# Altium PCB LPCB225R0.PcbDoc
Units mm, origin at the board's own origin, x right, y up, seen from the top; angles counter-clockwise.
Board outline 79 x 93 mm, 4 copper layers (Top Layer, Internal Plane 1, Mid-Layer 1, Bottom Layer); 110 components, 77 nets, 306 pads, 172 vias.
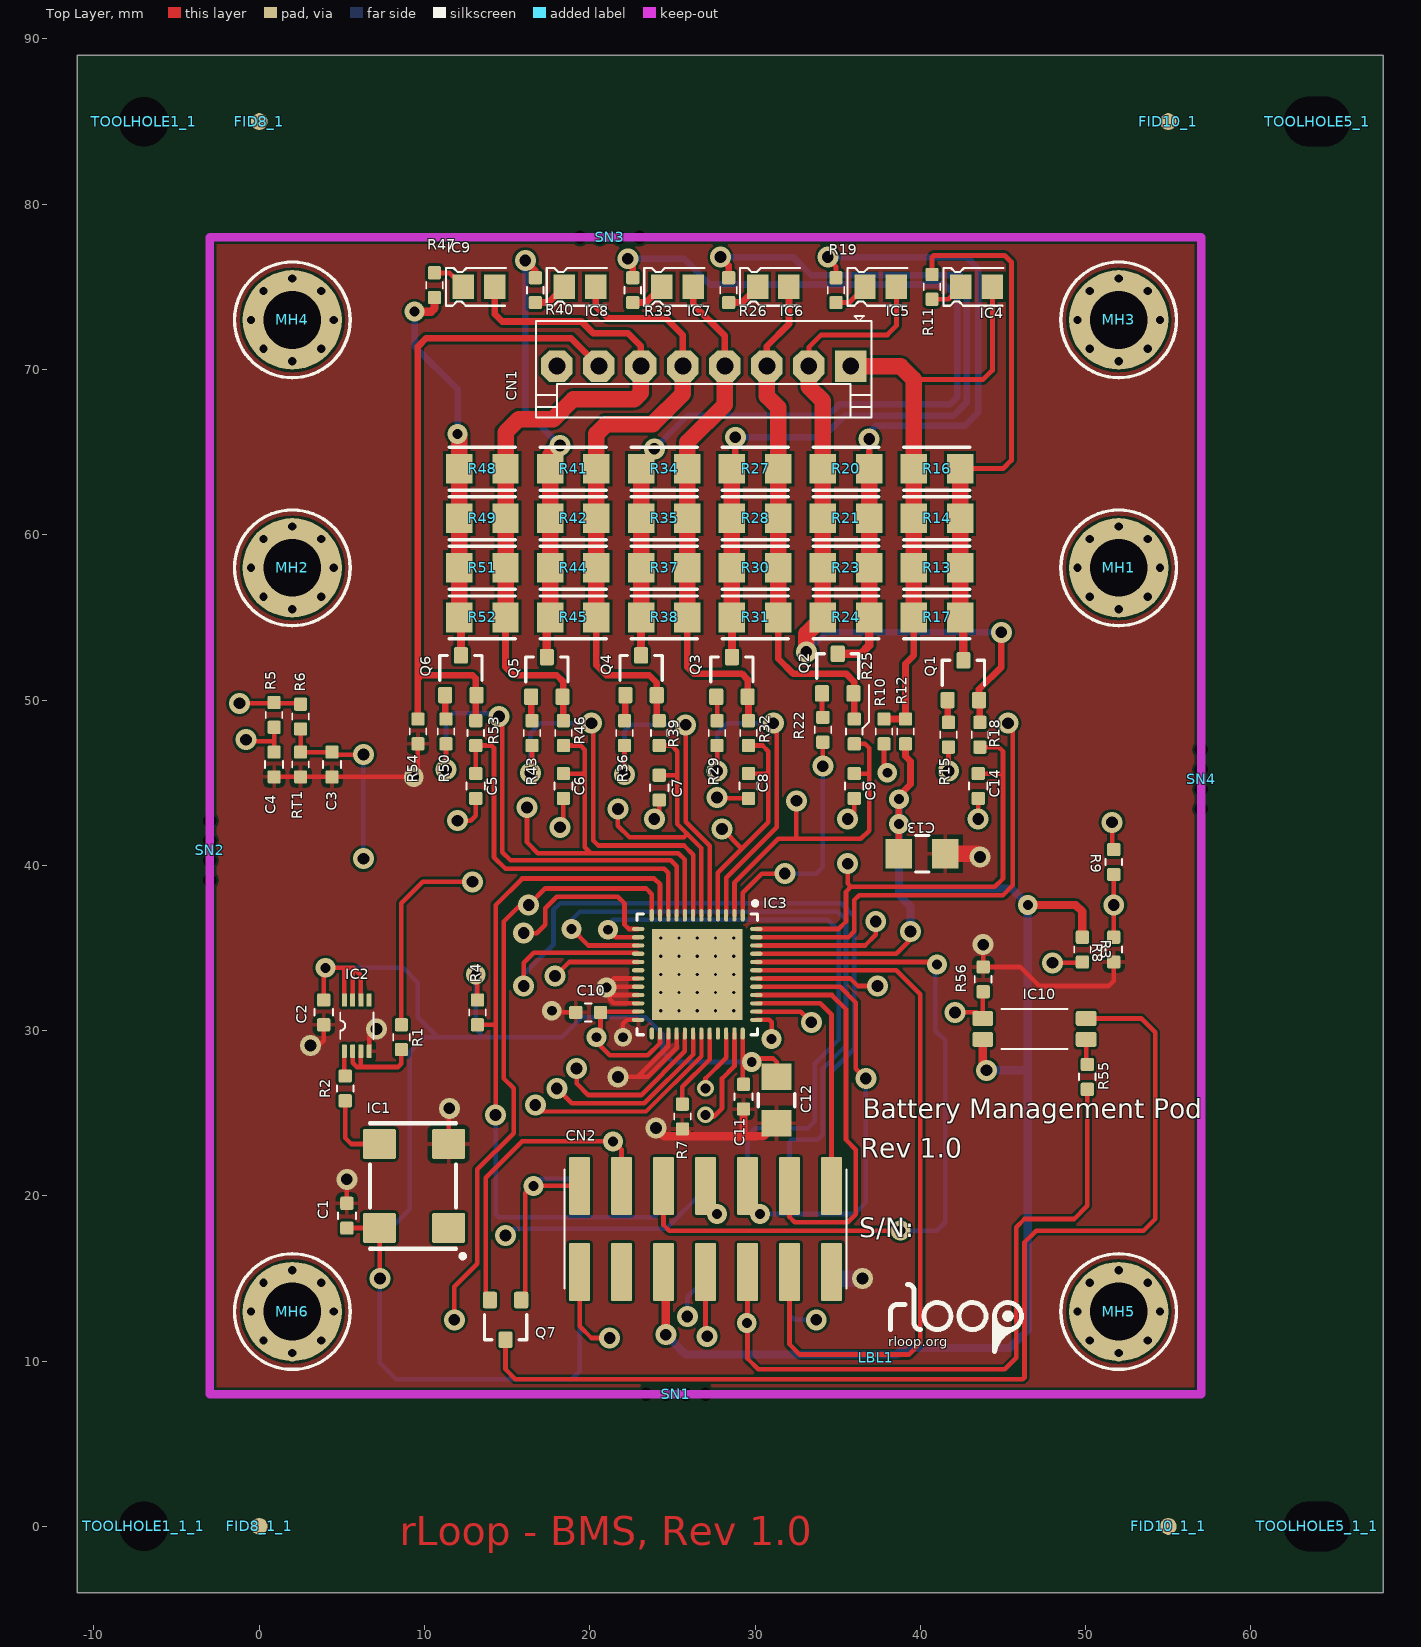
[diagram p0: Top Layer view]
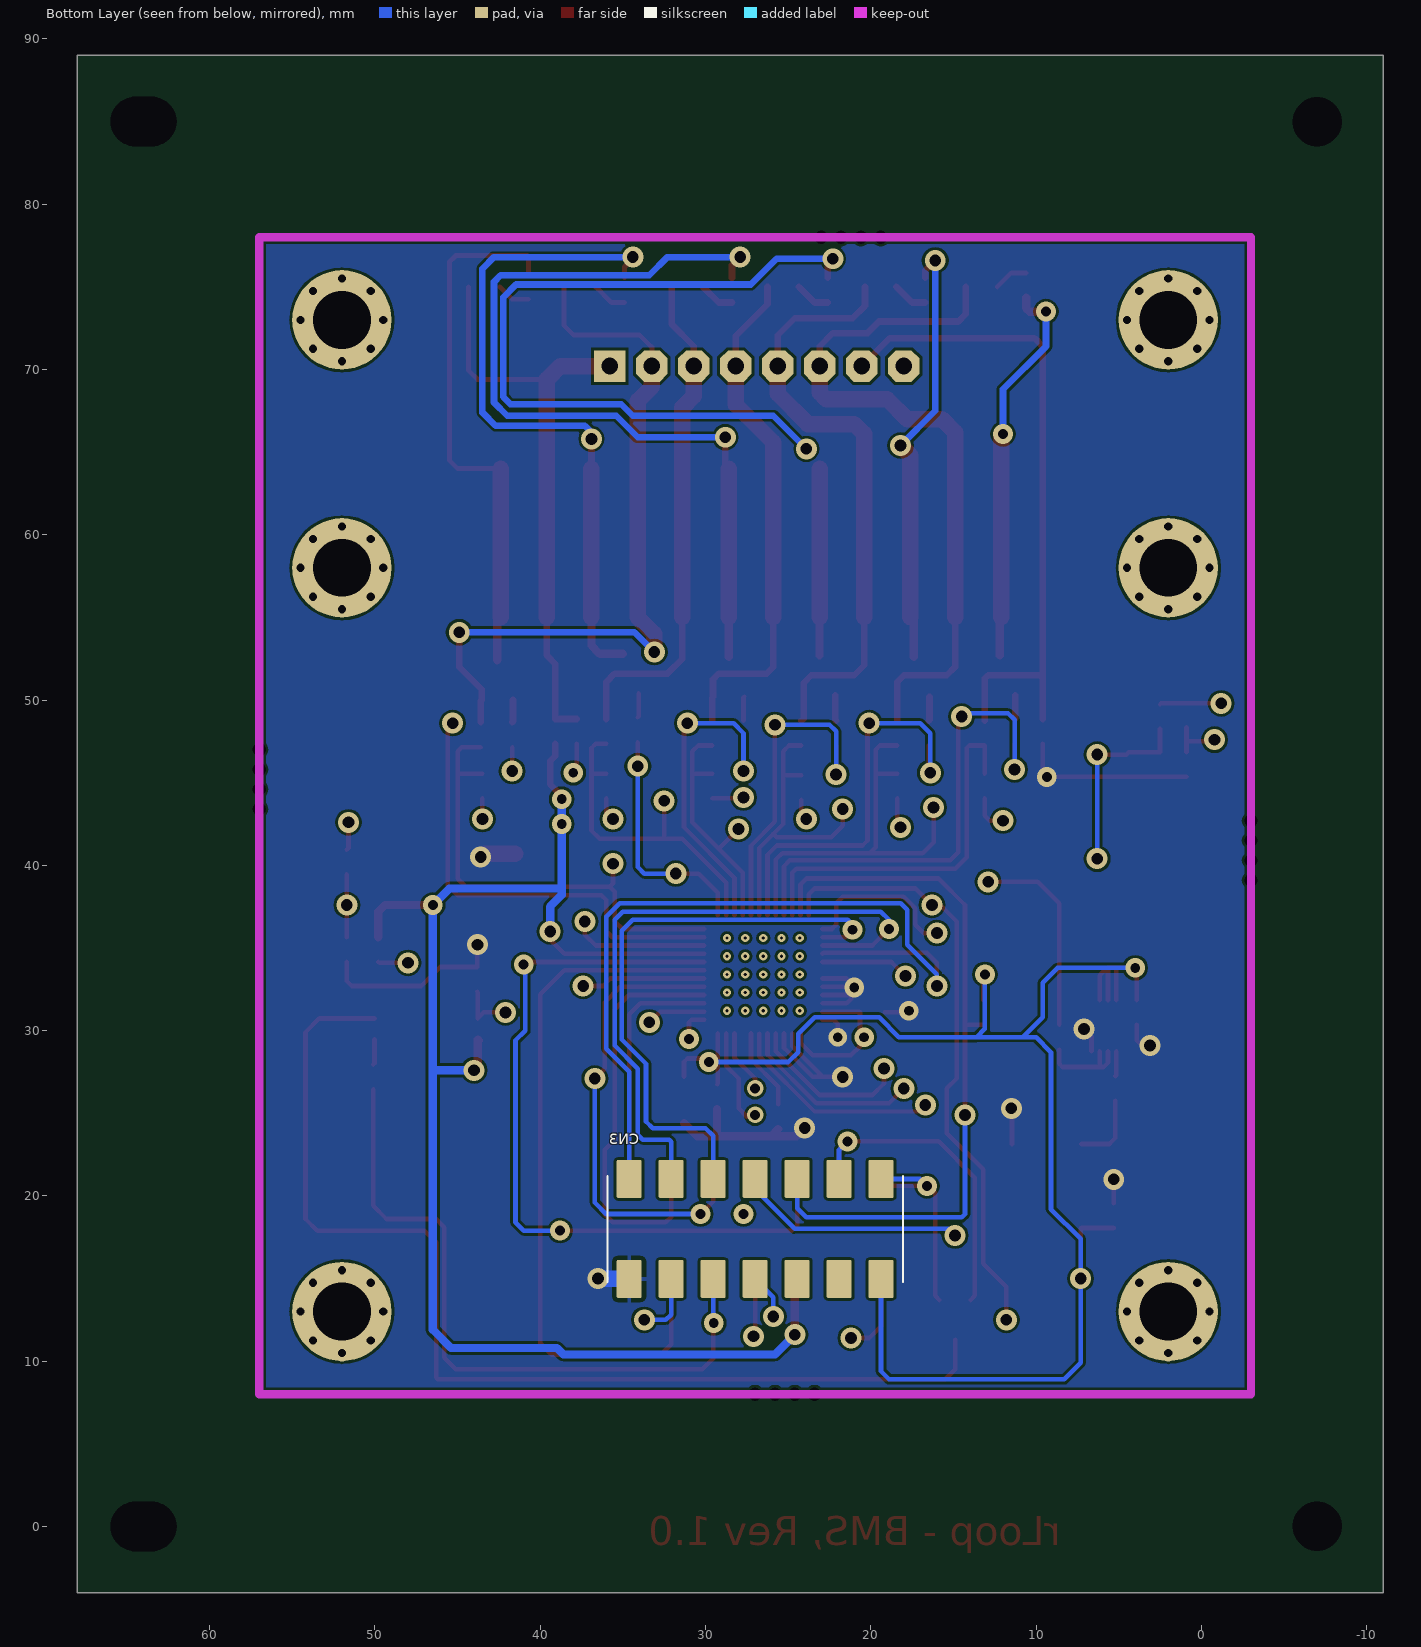
[diagram p1: Bottom Layer view, seen from below]
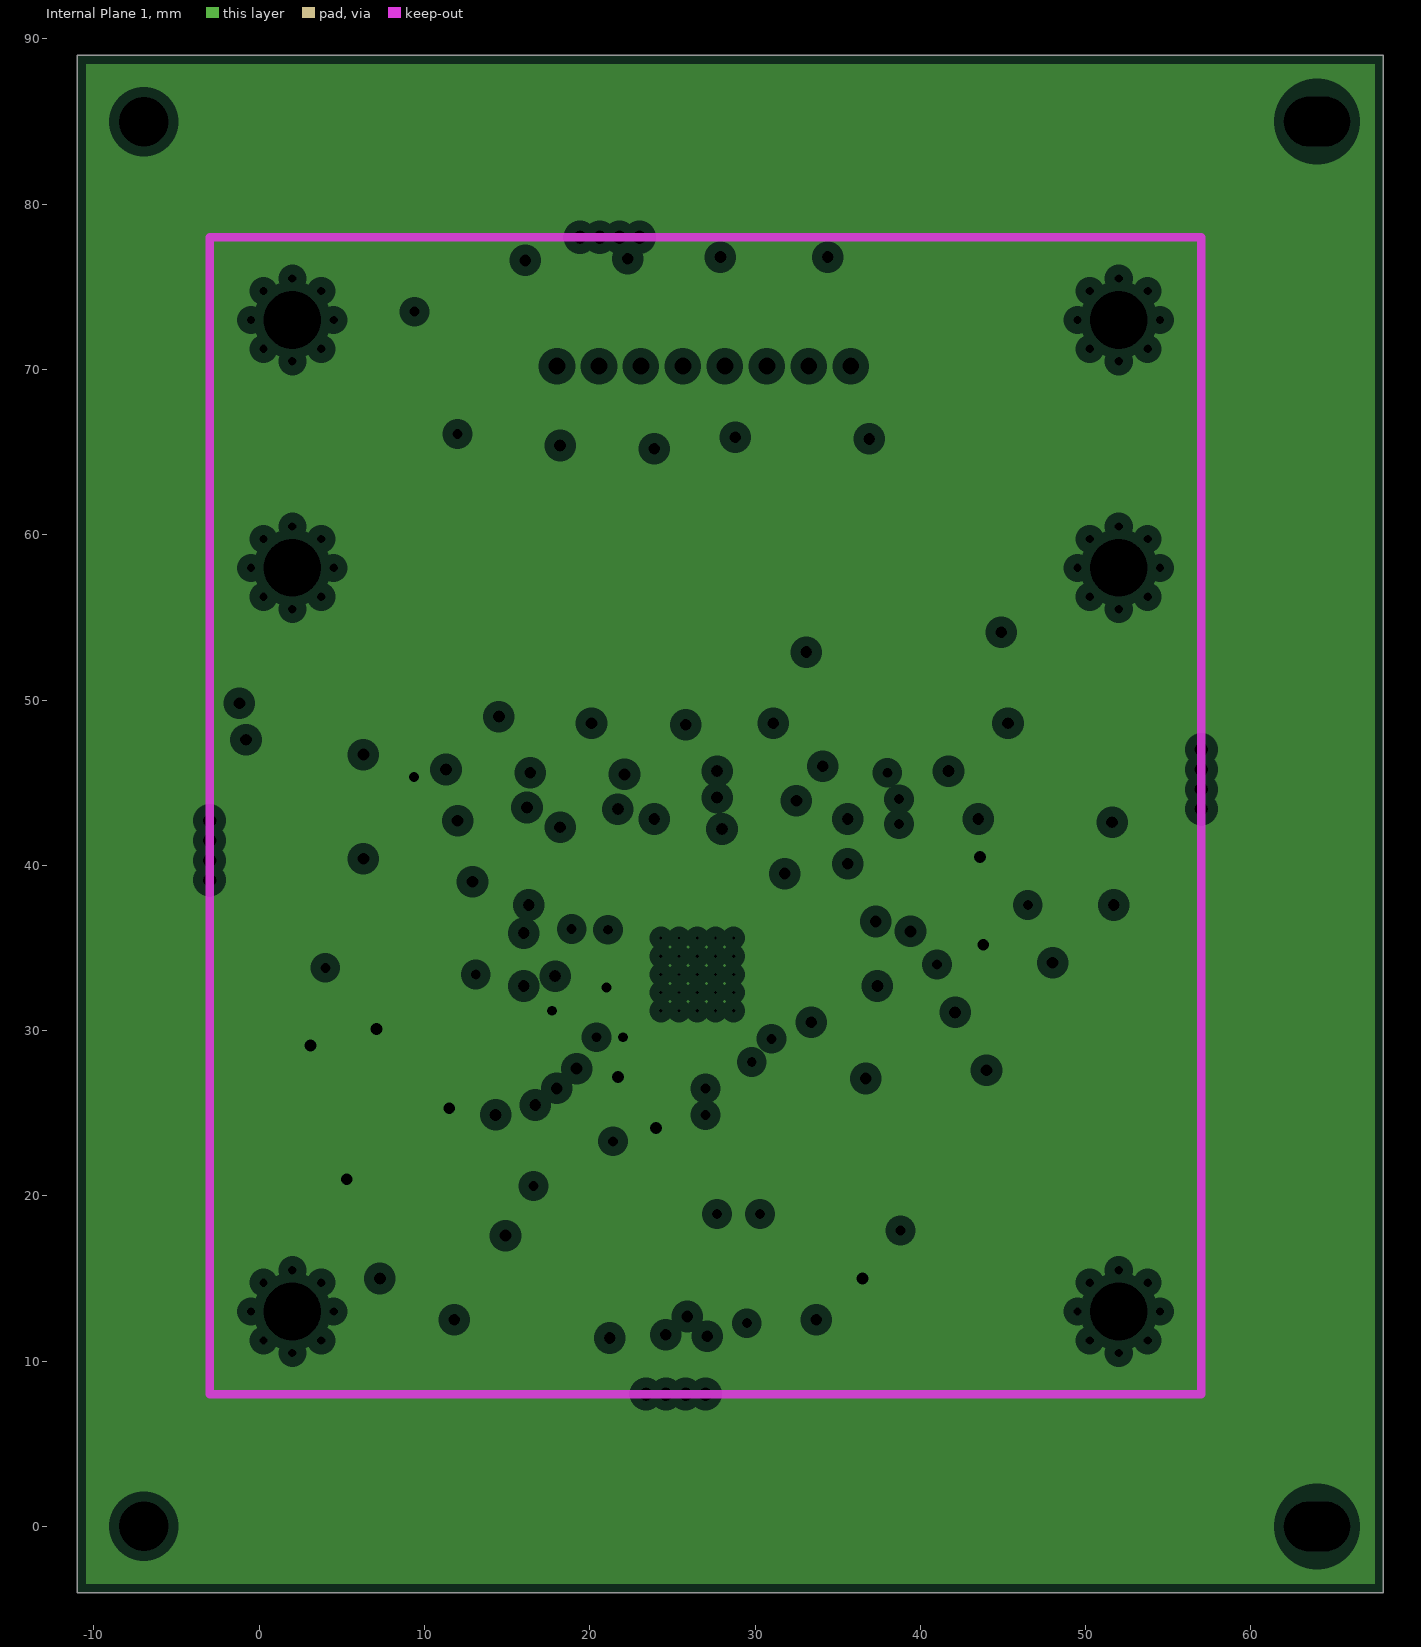
[diagram p2: Internal Plane 1, clearances drawn from the general rule]
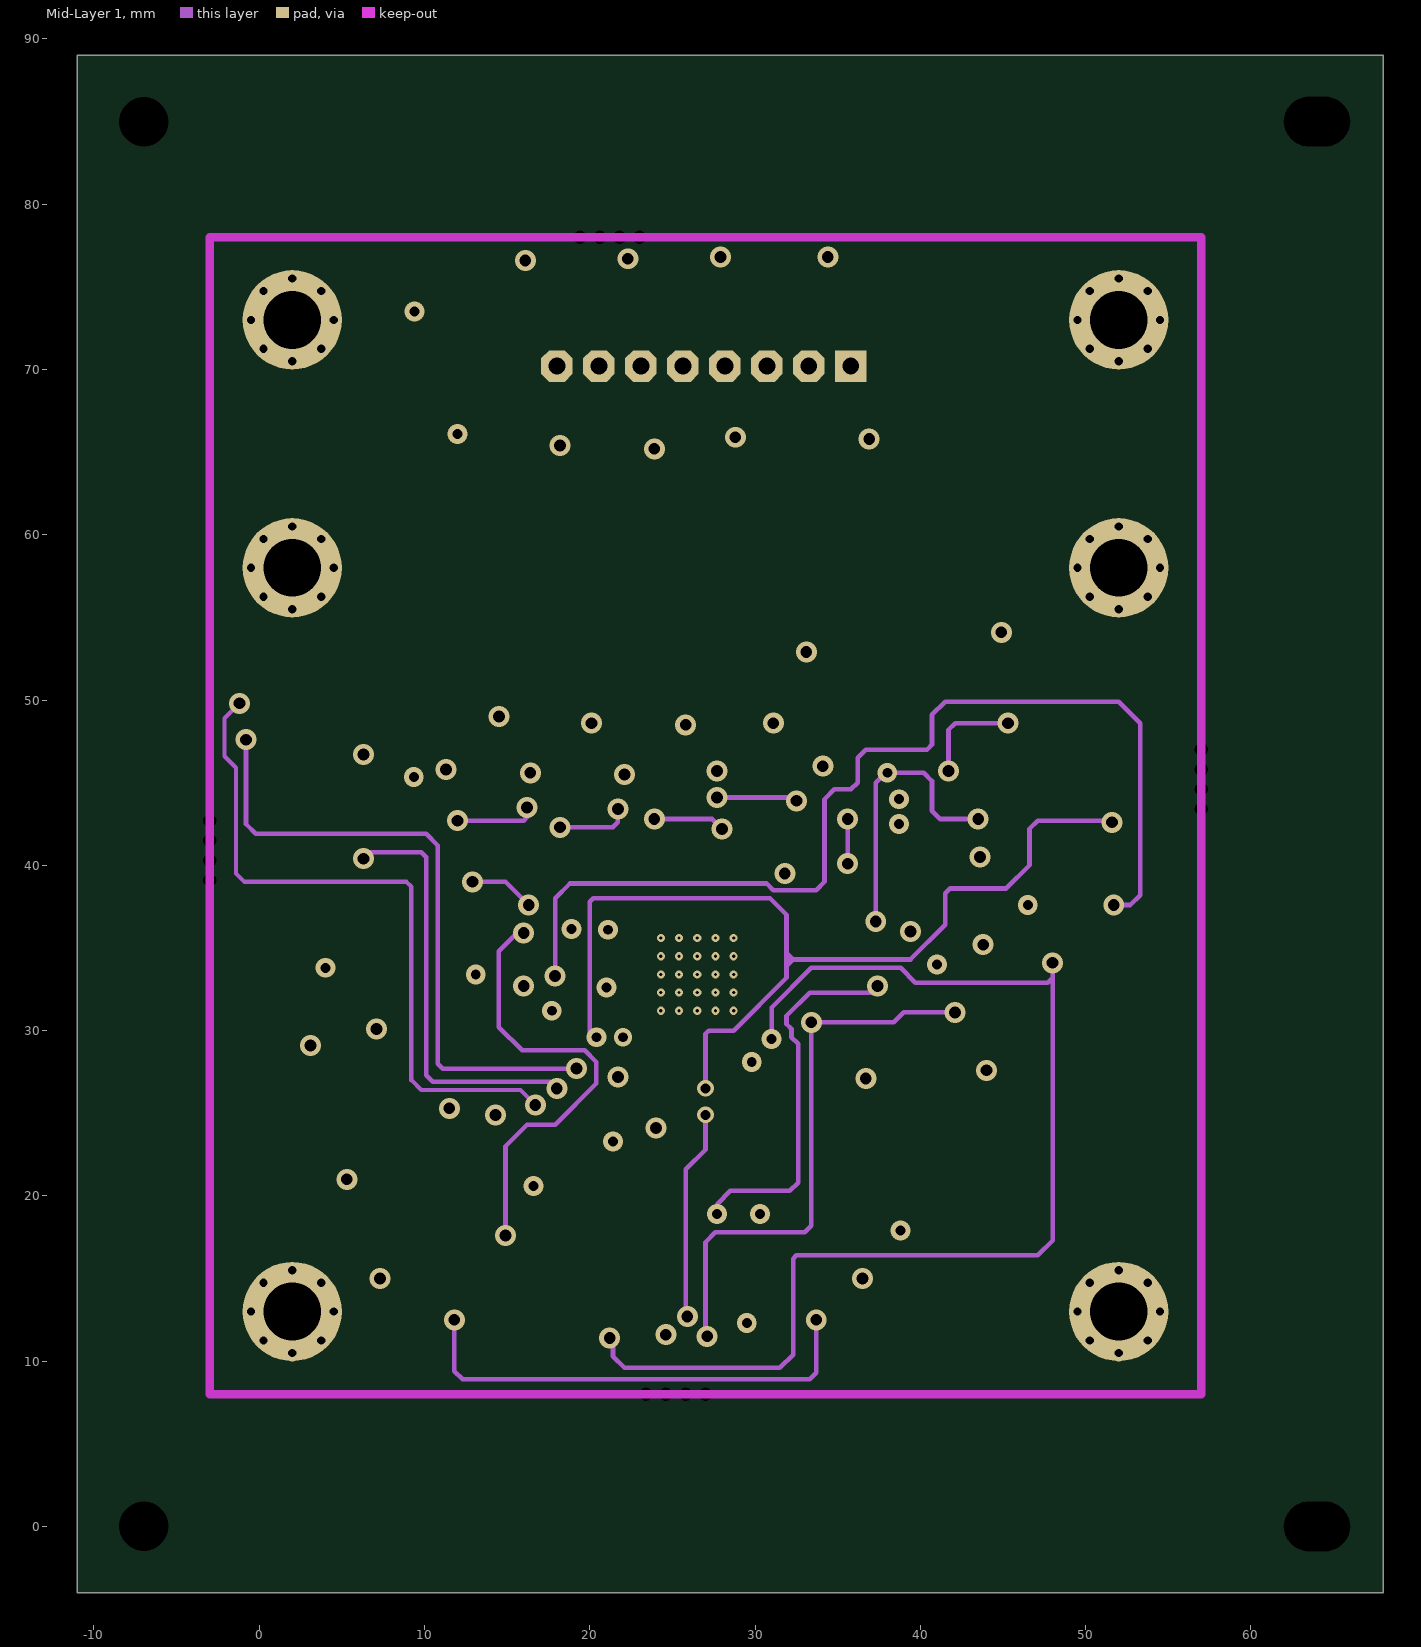
[diagram p3: Mid-Layer 1]

## Layer stack, top to bottom
Top Layer: signal copper 0.0356
Dielectric: core 0.32, FR-4, Dk 4.8
Internal Plane 1: plane copper 0.0356, net ATAGND
Dielectric: prepreg 0.32, FR-4, Dk 4.8
Mid-Layer 1: signal copper 0.0356
Dielectric: core 0.32, FR-4, Dk 4.8
Bottom Layer: signal copper 0.0356

## Board outline
-11,-4 -11,89 68,89 68,-4

## Design rules (kind name [scope] priority, off if disabled: settings)
Clearance [All] p1: gap=0.16
HoleSize [All] p1: absolutevalues=TRUE maxlimit=5 minlimit=0.025 maxpercent=80.000 minpercent=20.000
MinimumSolderMaskSliver [All] p1 off: minsoldermaskwidth=0.1
PlaneClearance [All] p1: clearance=0.6
PlaneConnect [All] p1: planeconnectstyle=Relief reliefexpansion=0.508 reliefentries=4 reliefconductorwidth=0.254 reliefairgap=0.254
PolygonConnect [IsVia] p1: connectstyle=Direct reliefconductorwidth=0.254 reliefentries=4 polygonreliefangle="90 Angle" airgapwidth=0.254
PolygonConnect PolygonConnect_1 [All] p2: connectstyle=Relief reliefconductorwidth=0.254 reliefentries=4 polygonreliefangle="90 Angle" airgapwidth=0.254
RoomDefinition "U_LPCB225 - POWER DOWN CONTROLLER" [InComponentClass('U_LPCB225 - POWER DOWN CONTROLLER')] p1: confinementstyle=ConfineIn formatcopy=TRUE lockcomponents=FALSE outline -79.611,-108.179 -28.811,-108.179 -28.811,-82.779 -79.611,-82.779
RoomDefinition "U_LPCB225 - CONTROLLER" [InComponentClass('U_LPCB225 - CONTROLLER')] p2: confinementstyle=ConfineIn formatcopy=TRUE lockcomponents=FALSE outline -79.611,-108.179 -28.811,-108.179 -28.811,-82.779 -79.611,-82.779
RoomDefinition "U_LPCB225 - DISCHARGE" [InComponentClass('U_LPCB225 - DISCHARGE')] p3: confinementstyle=ConfineIn formatcopy=TRUE lockcomponents=FALSE outline -79.611,-108.179 -28.811,-108.179 -28.811,-82.779 -79.611,-82.779
RoomDefinition "U_LPCB225 - CLOCK" [InComponentClass('U_LPCB225 - CLOCK')] p4: confinementstyle=ConfineIn formatcopy=TRUE lockcomponents=FALSE outline -79.611,-108.179 -28.811,-108.179 -28.811,-82.779 -79.611,-82.779
RoomDefinition "LPCB225 - OVERVIEW" [InComponentClass('LPCB225 - OVERVIEW')] p5: confinementstyle=ConfineIn formatcopy=TRUE lockcomponents=FALSE outline -79.611,-108.179 -28.811,-108.179 -28.811,-82.779 -79.611,-82.779
RoomDefinition "U_LPCB225 - STACK CONNECTORS" [InComponentClass('U_LPCB225 - STACK CONNECTORS')] p6: confinementstyle=ConfineIn formatcopy=TRUE lockcomponents=FALSE outline 69.089,69.421 88.189,69.421 88.189,90.321 69.089,90.321
RoutingVias [All] p1: holewidth=0.6 width=1.2 viastyle="Through Hole" minholewidth=0.6 minwidth=1.2 maxholewidth=1 maxwidth=3
SilkToSilkClearance [All] p1 off: silktosilkclearance=0.254
SilkToSolderMaskClearance [IsPad] p1 off: minsilkscreentomaskgap=0.254 clearancetoexposedcopper=TRUE
SolderMaskExpansion [All] p1: expansion=0.102
Width [All] p1: maxlimit=2 minlimit=0.254 preferedwidth=0.254
22 further rules are at their usual default settings.

## Classes and differential pairs
component class "LPCB225 - OVERVIEW": CN1 LBL1 MH1 MH2 MH3 MH4 MH5 MH6 SN1 SN2 SN3 SN4
component class "U_LPCB225 - CLOCK": C1 C2 IC1 IC2 R1 R2
component class "U_LPCB225 - CONTROLLER": C3 C4 C5 C6 C7 C8 C9 C10 C11 C12 C14 IC3 R3 R4 R5 R6 R7 R8 R9 RT1
component class "U_LPCB225 - DISCHARGE": C13 IC4 IC5 IC6 IC7 IC8 IC9 Q1 Q2 Q3 Q4 Q5 Q6 R10 R11 R12 R13 R14 R15 R16 R17 R18 R19 R20 R21 R22 R23 R24 R25 R26 R27 R28 R29 R30 R31 R32 R33 R34 R35 R36 R37 R38 R39 R40 R41 R42 R43 R44 R45 R46 R47 R48 R49 R50 R51 R52 R53 R54
component class "U_LPCB225 - POWER DOWN CONTROLLER": IC10 Q7 R55 R56
component class "U_LPCB225 - STACK CONNECTORS": CN2 CN3

## Components (designator, comment, footprint, x,y, rotation, side; value= is the part's Value field where it differs from the comment)
C1 "100n / 50V / 10% / SMD 0603" LFP011__CC1608-0603-IPC7351_B 5.3,18.8 r90 top
C2 "100n / 50V / 10% / SMD 0603" LFP011__CC1608-0603-IPC7351_B 3.9,31.1 r270 top
C3 "100n / 50V / 10% / SMD 0603" LFP011__CC1608-0603-IPC7351_B 4.4,46.1 r270 top
C4 "100n / 50V / 10% / SMD 0603" LFP011__CC1608-0603-IPC7351_B 0.9,46.1 r270 top
C5 "100n / 50V / 10% / SMD 0603" LFP011__CC1608-0603-IPC7351_B 13.1,44.8 r90 top
C6 "100n / 50V / 10% / SMD 0603" LFP011__CC1608-0603-IPC7351_B 18.4,44.8 r90 top
C7 "100n / 50V / 10% / SMD 0603" LFP011__CC1608-0603-IPC7351_B 24.2,44.7 r90 top
C8 "100n / 50V / 10% / SMD 0603" LFP011__CC1608-0603-IPC7351_B 29.6,44.8 r90 top
C9 "100n / 50V / 10% / SMD 0603" LFP011__CC1608-0603-IPC7351_B 36,44.8 r90 top
C10 "100n / 50V / 10% / SMD 0603" LFP011__CC1608-0603-IPC7351_B 19.9,31.1 r180 top
C11 "100n / 50V / 10% / SMD 0603" LFP011__CC1608-0603-IPC7351_B 29.3,26 r270 top
C12 "47uF / 25V / 20% / SMD 1206" LFP043__CC3216-1206 31.3,25.8 r270 top
C13 "10uF / 35V / X7R / SMD 1206" LFP043__CC3216-1206 40.1,40.7 r0 top
C14 "100n / 50V / 10% / SMD 0603" LFP011__CC1608-0603-IPC7351_B 43.5,44.8 r90 top
CN1 "640456-8" 640456-8 26.9,70.2 r180 top
CN2 "1241050-7" 1241050-7 27,18 r180 top locked
CN3 "5-147741-7" 5-147741-7 27,18 r180 bottom locked
FID8_1 "FIDUCIAL" FIDTOP 0,85 r0 top
FID8_1_1 "FIDUCIAL" FIDTOP 0,0 r0 top
FID10_1 "FIDUCIAL" FIDTOP 55,85 r0 top
FID10_1_1 "FIDUCIAL" FIDTOP 55,0 r0 top
IC1 "FXO-HC736R-1.000" LFP132__SMO-190 9.3,20.6 r90 top
IC2 "SN74AUP1G74DCUR" LFP052__DCU-S-PDSO-G8 5.9,30.3 r0 top
IC3 "ATA6870N-PLQW-1" LFP136__QFN50P700X700X80_HS-49M 26.5,33.4 r180 top locked
IC4 "EL-17-21VGC/TR8" CR2012-0805-LED 43.4,75 r0 top
IC5 "EL-17-21VGC/TR8" CR2012-0805-LED 37.6,75 r0 top
IC6 "EL-17-21VGC/TR8" CR2012-0805-LED 31.1,75 r0 top
IC7 "EL-17-21VGC/TR8" CR2012-0805-LED 25.3,75 r0 top
IC8 "EL-17-21VGC/TR8" CR2012-0805-LED 19.4,75 r0 top
IC9 "EL-17-21VGC/TR8" CR2012-0805-LED 13.3,75 r0 top
IC10 "VOS618A-2X001T" LFP085__VOS618A 46.9,30.1 r180 top
LBL1 "RLOOP_LOGO" RLOOP_LOGO 37.3,10.2 r0 top
MH1 "MOUNTING_HOLE_3MM" MOUNTING_HOLE_3MM 52,58 r0 top locked
MH2 "MOUNTING_HOLE_3MM" MOUNTING_HOLE_3MM 2,58 r0 top locked
MH3 "MOUNTING_HOLE_3MM" MOUNTING_HOLE_3MM 52,73 r0 top locked
MH4 "MOUNTING_HOLE_3MM" MOUNTING_HOLE_3MM 2,73 r0 top locked
MH5 "MOUNTING_HOLE_3MM" MOUNTING_HOLE_3MM 52,13 r0 top locked
MH6 "MOUNTING_HOLE_3MM" MOUNTING_HOLE_3MM 2,13 r0 top locked
Q1 "BSS138" LFP021__SOT23 42.6,51.2 r0 top
Q2 "BSS138" LFP021__SOT23 35,51.6 r0 top
Q3 "BSS138" LFP021__SOT23 28.6,51.4 r0 top
Q4 "BSS138" LFP021__SOT23 23.1,51.5 r0 top
Q5 "BSS138" LFP021__SOT23 17.4,51.4 r0 top
Q6 "BSS138" LFP021__SOT23 12.2,51.5 r0 top
Q7 "FDN337N" LFP021__SOT23 14.9,12.5 r180 top
R1 "47R / 0.1W / 1% / SMD 0603" LFP020__CR1608-0603-IPC7351_B 8.6,29.6 r90 top
R2 "47R / 0.1W / 1% / SMD 0603" LFP020__CR1608-0603-IPC7351_B 5.2,26.5 r90 top
R3 "0R / 0.1W / SMD 0603" LFP020__CR1608-0603-IPC7351_B 49.8,34.9 r270 top
R4 "10K / 0.1W / 1% / SMD 0603" LFP020__CR1608-0603-IPC7351_B 13.2,31.1 r90 top
R5 "10K / 0.1W / 1% / SMD 0603" LFP020__CR1608-0603-IPC7351_B 0.9,49.1 r90 top
R6 "10K / 0.1W / 1% / SMD 0603" LFP020__CR1608-0603-IPC7351_B 2.5,49 r90 top
R7 "121K / 0.1W / 1% / SMD 0603" LFP020__CR1608-0603-IPC7351_B 25.6,24.8 r270 top
R8 "10K / 0.1W / 1% / SMD 0603" LFP020__CR1608-0603-IPC7351_B 51.7,34.9 r90 top
R9 "10K / 0.1W / 1% / SMD 0603" LFP020__CR1608-0603-IPC7351_B 51.7,40.2 r270 top
R10 "1K0 / 0.063W / 1% / SMD 0603" LFP020__CR1608-0603-IPC7351_B 37.8,48.1 r270 top
R11 "100K / 0.063W / 1% / SMD 0603" LFP020__CR1608-0603-IPC7351_B 40.7,75 r90 top
R12 "10R / 0.125W / 1% / SMD 0603" LFP020__CR1608-0603-IPC7351_B 39.1,48.1 r90 top
R13 "82.5R / 0.25W / 1% / SMD 1206" LFP107__CR3216-1206 41,58 r0 top
R14 "82.5R / 0.25W / 1% / SMD 1206" LFP107__CR3216-1206 41,61 r0 top
R15 "1K0 / 0.063W / 1% / SMD 0603" LFP020__CR1608-0603-IPC7351_B 41.7,47.9 r270 top
R16 "82.5R / 0.25W / 1% / SMD 1206" LFP107__CR3216-1206 41,64 r0 top
R17 "82.5R / 0.25W / 1% / SMD 1206" LFP107__CR3216-1206 41,55 r0 top
R18 "1K0 / 0.063W / 1% / SMD 0603" LFP020__CR1608-0603-IPC7351_B 43.6,47.9 r270 top
R19 "100K / 0.063W / 1% / SMD 0603" LFP020__CR1608-0603-IPC7351_B 34.9,74.8 r90 top
R20 "82.5R / 0.25W / 1% / SMD 1206" LFP107__CR3216-1206 35.5,64 r0 top
R21 "82.5R / 0.25W / 1% / SMD 1206" LFP107__CR3216-1206 35.5,61 r0 top
R22 "1K0 / 0.063W / 1% / SMD 0603" LFP020__CR1608-0603-IPC7351_B 34.1,48.2 r270 top
R23 "82.5R / 0.25W / 1% / SMD 1206" LFP107__CR3216-1206 35.5,58 r0 top
R24 "82.5R / 0.25W / 1% / SMD 1206" LFP107__CR3216-1206 35.5,55 r0 top
R25 "1K0 / 0.063W / 1% / SMD 0603" LFP020__CR1608-0603-IPC7351_B 36,48.1 r270 top
R26 "100K / 0.063W / 1% / SMD 0603" LFP020__CR1608-0603-IPC7351_B 28.4,74.8 r90 top
R27 "82.5R / 0.25W / 1% / SMD 1206" LFP107__CR3216-1206 30,64 r180 top
R28 "82.5R / 0.25W / 1% / SMD 1206" LFP107__CR3216-1206 30,61 r180 top
R29 "1K0 / 0.063W / 1% / SMD 0603" LFP020__CR1608-0603-IPC7351_B 27.7,48 r270 top
R30 "82.5R / 0.25W / 1% / SMD 1206" LFP107__CR3216-1206 30,58 r180 top
R31 "82.5R / 0.25W / 1% / SMD 1206" LFP107__CR3216-1206 30,55 r180 top
R32 "1K0 / 0.063W / 1% / SMD 0603" LFP020__CR1608-0603-IPC7351_B 29.6,48 r270 top
R33 "100K / 0.063W / 1% / SMD 0603" LFP020__CR1608-0603-IPC7351_B 22.6,74.8 r90 top
R34 "82.5R / 0.25W / 1% / SMD 1206" LFP107__CR3216-1206 24.5,64 r180 top
R35 "82.5R / 0.25W / 1% / SMD 1206" LFP107__CR3216-1206 24.5,61 r180 top
R36 "1K0 / 0.063W / 1% / SMD 0603" LFP020__CR1608-0603-IPC7351_B 22.1,48 r270 top
R37 "82.5R / 0.25W / 1% / SMD 1206" LFP107__CR3216-1206 24.5,58 r180 top
R38 "82.5R / 0.25W / 1% / SMD 1206" LFP107__CR3216-1206 24.5,55 r180 top
R39 "1K0 / 0.063W / 1% / SMD 0603" LFP020__CR1608-0603-IPC7351_B 24.2,48 r270 top
R40 "100K / 0.063W / 1% / SMD 0603" LFP020__CR1608-0603-IPC7351_B 16.7,74.8 r90 top
R41 "82.5R / 0.25W / 1% / SMD 1206" LFP107__CR3216-1206 19,64 r180 top
R42 "82.5R / 0.25W / 1% / SMD 1206" LFP107__CR3216-1206 19,61 r180 top
R43 "1K0 / 0.063W / 1% / SMD 0603" LFP020__CR1608-0603-IPC7351_B 16.5,48 r270 top
R44 "82.5R / 0.25W / 1% / SMD 1206" LFP107__CR3216-1206 19,58 r180 top
R45 "82.5R / 0.25W / 1% / SMD 1206" LFP107__CR3216-1206 19,55 r180 top
R46 "1K0 / 0.063W / 1% / SMD 0603" LFP020__CR1608-0603-IPC7351_B 18.4,48 r270 top
R47 "100K / 0.063W / 1% / SMD 0603" LFP020__CR1608-0603-IPC7351_B 10.6,75.1 r270 top
R48 "82.5R / 0.25W / 1% / SMD 1206" LFP107__CR3216-1206 13.5,64 r180 top
R49 "82.5R / 0.25W / 1% / SMD 1206" LFP107__CR3216-1206 13.5,61 r180 top
R50 "1K0 / 0.063W / 1% / SMD 0603" LFP020__CR1608-0603-IPC7351_B 11.3,48.1 r270 top
R51 "82.5R / 0.25W / 1% / SMD 1206" LFP107__CR3216-1206 13.5,58 r180 top
R52 "82.5R / 0.25W / 1% / SMD 1206" LFP107__CR3216-1206 13.5,55 r180 top
R53 "1K0 / 0.063W / 1% / SMD 0603" LFP020__CR1608-0603-IPC7351_B 13.1,48 r270 top
R54 "10R / 0.125W / 1% / SMD 0603" LFP020__CR1608-0603-IPC7351_B 9.6,48.1 r90 top
R55 "270R / 0.1W / 5% / SMD 0603" LFP020__CR1608-0603-IPC7351_B 50.1,27.2 r270 top
R56 "2.2K / 0.1W / 1% / SMD 0603" LFP020__CR1608-0603-IPC7351_B 43.8,33.1 r270 top
RT1 "NTCS0603E3103JLT" LFP020__CR1608-0603-IPC7351_B 2.5,46.1 r90 top
SN1 "PCB_SNAPOUT" SNAPOUT_NEW 27,8 r180 top
SN2 "PCB_SNAPOUT" SNAPOUT_NEW -3,39.1 r90 top
SN3 "PCB_SNAPOUT" SNAPOUT_NEW 23,78 r180 top
SN4 "PCB_SNAPOUT" SNAPOUT_NEW 57,43.4 r90 top
TOOLHOLE1_1 "Comment" TOOL-1#1 -7,85 r0 top
TOOLHOLE1_1_1 "Comment" TOOL-1#1 -7,0 r0 top
TOOLHOLE5_1 "Comment" TOOL-1#2 64,85 r0 top
TOOLHOLE5_1_1 "Comment" TOOL-1#2 64,0 r0 top

## Footprints (in the part's own frame and the unit in brackets; to place one, negate y for a bottom-side part, rotate by r counter-clockwise, add the part's x,y. Pads: shape width x height; smd on the part's side, far side on the other; paste and mask are expansions set on the pad)
5-147741-7 [mm]
  rrect10% 1.52x2.29 smd: 1(-7.62,3.025) 2(-7.62,-3.025) 3(-5.08,3.025) 4(-5.08,-3.025) 5(-2.54,3.025) 6(-2.54,-3.025) 7(0,3.025) 8(0,-3.025) 9(2.54,3.025) 10(2.54,-3.025) 11(5.08,3.025) 12(5.08,-3.025) 13(7.62,3.025) 14(7.62,-3.025)
  silkscreen extent -8.94,-3.2 8.94,3.2
640456-8 [mm] "Connector, Male Header, 8 Way"
  rect 1.905x1.905 hole 1.02: 1(-8.89,0)
  oct 1.905x1.905 hole 1.02: 2(-6.35,0) 3(-3.81,0) 4(-1.27,0) 5(1.27,0) 6(3.81,0) 7(6.35,0) 8(8.89,0)
  silkscreen extent -10.15,-3.04 10.17,3.1
1241050-7 [mm]
  rrect10% 1.27x3.5 smd paste-0.01: 1(-7.62,-2.605) 2(-7.62,2.605) 3(-5.08,-2.605) 4(-5.08,2.605) 5(-2.54,-2.605) 6(-2.54,2.605) 7(0,-2.605) 8(0,2.605) 9(2.54,-2.605) 10(2.54,2.605) 11(5.08,-2.605) 12(5.08,2.605) 13(7.62,-2.605) 14(7.62,2.605)
  silkscreen extent -8.54,-3.6 8.54,3.6
CR2012-0805-LED [mm]
  rect 1.3x1.5 smd: A(0.95,0) K(-0.95,0)
  silkscreen extent -2.01,-1.14 1.63,1.14
FIDTOP [mil]
  round 40 smd mask+39.37: 1(0,0)
LFP011__CC1608-0603-IPC7351_B [mm]
  rrect25% 0.8x0.8 smd: 1(-0.75,0) 2(0.75,0)
  silkscreen extent -0.2,-0.55 0.2,0.55
LFP020__CR1608-0603-IPC7351_B [mm]
  rrect25% 0.8x0.8 smd: 1(-0.75,0) 2(0.75,0)
  silkscreen extent -0.2,-0.5 0.2,0.5
LFP021__SOT23 [mm] "SOT-23; 3 Leads; Body 3.0 x 2.5 mm, inc. leads (LxW max)"
  rrect25% 0.85x1 smd paste-0.05: 1(-0.95,-1.2) 2(0.95,-1.2) 3(0,1.2)
  silkscreen extent -1.27,-0.3 1.28,1.2
LFP043__CC3216-1206 [mm]
  rect 1.6x1.8 smd paste-0.01: 1(-1.4,0) 2(1.4,0)
  silkscreen extent -0.4,-1.1 0.4,1.1
LFP052__DCU-S-PDSO-G8 [mm] "TI DCU (S-PDSO-G8) PLASTIC SMALL-OUTLINE PACKAGE (DIE DOWN)"
  rrect25% 0.3x0.8 smd paste-0.05: 1(-0.75,-1.55) 2(-0.25,-1.55) 3(0.25,-1.55) 4(0.75,-1.55) 5(0.75,1.55) 6(0.25,1.55) 7(-0.25,1.55) 8(-0.75,1.55)
  silkscreen extent -1,-0.79 1,0.79
LFP085__VOS618A [mm]
  rrect25% 1.25x0.9 smd paste-0.05: 1(-3.125,0.635) 2(-3.125,-0.635) 3(3.125,-0.635) 4(3.125,0.635)
  silkscreen extent -2,-1.2 2,1.2
LFP107__CR3216-1206 [mm]
  rect 1.6x1.8 smd: 1(-1.4,0) 2(1.4,0)
  silkscreen extent -2,-1.3 2,1.3
LFP132__SMO-190 [mil] "7.0 x 5.0 SMD Oscillator Package"
  rrect10% 70.8x78.7 smd: 1(-100,-85) 2(100,-85) 3(100,80) 4(-100,80)
  silkscreen extent -172,-124 150,102
LFP136__QFN50P700X700X80_HS-49M [mm] "QFN, 48-Leads, Body 7.00x7.00mm, Pitch 0.50mm, Thermal Pad 5.50x5.50mm, IPC Low Density"
  oval 0.25x0.75 smd paste-0.03: 1(-2.75,-3.575) 2(-2.25,-3.575) 3(-1.75,-3.575) 4(-1.25,-3.575) 5(-0.75,-3.575) 6(-0.25,-3.575) 7(0.25,-3.575) 8(0.75,-3.575) 9(1.25,-3.575) 10(1.75,-3.575) 11(2.25,-3.575) 12(2.75,-3.575) 25(2.75,3.575) 26(2.25,3.575) 27(1.75,3.575) 28(1.25,3.575) 29(0.75,3.575) 30(0.25,3.575) 31(-0.25,3.575) 32(-0.75,3.575) 33(-1.25,3.575) 34(-1.75,3.575) 35(-2.25,3.575) 36(-2.75,3.575)
  oval 0.75x0.25 smd paste-0.03: 13(3.575,-2.75) 14(3.575,-2.25) 15(3.575,-1.75) 16(3.575,-1.25) 17(3.575,-0.75) 18(3.575,-0.25) 19(3.575,0.25) 20(3.575,0.75) 21(3.575,1.25) 22(3.575,1.75) 23(3.575,2.25) 24(3.575,2.75) 37(-3.575,2.75) 38(-3.575,2.25) 39(-3.575,1.75) 40(-3.575,1.25) 41(-3.575,0.75) 42(-3.575,0.25) 43(-3.575,-0.25) 44(-3.575,-0.75) 45(-3.575,-1.25) 46(-3.575,-1.75) 47(-3.575,-2.25) 48(-3.575,-2.75)
  rect 5.5x5.5 smd paste-6: PAD(0,0)
  silkscreen extent -3.65,-4.42 3.65,3.65
MOUNTING_HOLE_3MM [mm] "Non-plated mounting hole for 3mm screw"
  round 6 hole 3.5 mask+0.051: MOUNT(0,0)
  silkscreen extent -3.5,-3.5 3.5,3.5
RLOOP_LOGO [mm]
  silkscreen extent 0.89,0.39 8.82,4.45
SNAPOUT_NEW [mm]
  round 0.4 hole 0.8 unplated: 0(0,0) 0(1.2,0) 0(2.4,0) 0(3.6,0)
TOOL-1#1 [mm]
  round 2.54 hole 3 unplated: TOOL(0,0)
TOOL-1#2 [mm]
  round 0.076 hole 3 slot 4 at 0 deg unplated: TOOL1(0,0)

## Part data
C1 C2 C3 C4 C5 C6 C7 C8 C9 C10 C11 C14: "Capacitor, Ceramic Chip, 100nF (0.1uF), 50V, 5%, SMD 0603 [LCA016]"
C12: "Capacitor, Ceramic Chip, 47uF, 25V, 20%, SMD 1206 [LCA113]"
C13: "Capactor, Ceramic Chip, 10uF, 35V, 20% (X7R), SMD 1206 [LCA114]"
CN1: "Connector, Male Header, 8 Way"
CN2: "Connector, Header, 2.54mm, 7 Pins x 2 Rows, SMD"
CN3: "Connector, Socket, 2.54mm, 7 pins x 2 Rows, SMD"
IC1: "IC, Oscillator Module, 1MHz, 3.3V, SMD [LIC578]"
IC2: "IC, Flip Flop, SMD SOP8 [LIC566]"
IC4 IC5 IC6 IC7 IC8 IC9: "LED, SMD, 0805 Green [LIC016]"
IC10: "IC, Optocoupler, SMD [LIC408]"
MH1 MH2 MH3 MH4 MH5 MH6: "3MM Mouting Hole"
Q1 Q2 Q3 Q4 Q5 Q6: "FET, N Channel, Logic Level, SMD SOT23 [LIC163]"
Q7: "FET, N Channel, Logic Level, SMD SOT23 [LIC241]"
R1 R2: "Resistor, Ceramic Chip, 47R, 0.1W, 1%, SMD 0603 [LRE037]"
R3: "Resistor, Ceramic Chip, 0R, 0.1W, SMD 0603 [LRE026]"
R4 R5 R6 R8 R9: "Resistor, Ceramic Chip, 10K, 0.1W, 1%, SMD 0603 [LRE030]"
R7: "Resistor, Ceramic Chip, 121K, 0.1W, SMD 0603 [LRE212]"
R10 R15 R18 R22 R25 R29 R32 R36 R39 R43 R46 R50 R53: "Resistor, Ceramic Chip, 1K0, 0.063W, 1%, SMD 0603 [LRE106]"
R11 R19 R26 R33 R40 R47: "Resistor, Ceramic Chip, 100K0, 0.063W, 1%, SMD 0603 [LRE107]"
R12 R54: "Resistor, Ceramic Chip, 10R, 0.063W, 1%, SMD 0603 [LRE126]"
R13 R14 R16 R17 R20 R21 R23 R24 R27 R28 R30 R31 R34 R35 R37 R38 R41 R42 R44 R45 R48 R49 R51 R52: "Resistor, Ceramic Chip, 82.5R, 0.25W, 1%, SMD 1206 [LRE202]"
R55: "Resistor, Ceramic Chip, 270R, 0.1W, 1%, SMD 0603 [LRE150]"
R56: "Resistor, Ceramic Chip, 2.2K, 0.1W, 1%, SMD 0603 [LRE027]"
RT1: "Thermistor, 10K, 5%, SMD 0603 [LRE213]"

## Via types
v1: diameter 1.27, hole 0.711, Top Layer to Bottom Layer, 73 vias
v2: diameter 1.016, hole 0.5, Top Layer to Bottom Layer, tented both sides, 48 vias
v3: diameter 0.5, hole 0.2, Top Layer to Bottom Layer, 25 vias
v4: diameter 1.2, hole 0.6, Top Layer to Bottom Layer, 23 vias
v5: diameter 1, hole 0.6, Top Layer to Bottom Layer, 2 vias
v6: diameter 1.1, hole 0.6, Top Layer to Bottom Layer, 1 vias

## Nets (pads, with @x,y where several pads share a name; then routed paths per layer and width w, separated by ;. In a path a pad name is that pad's centre, name@x,y a point inside that pad or via, vN(x,y) a via of type N, cw(c..) or ccw(c..) an arc to the next point about the centre after c; other vN are vias at no path point)
ATA3V3: C10.1 IC3.23 IC3.26 IC3.34 R9.1 | length 75.8
  Top Layer w0.28: IC3.23 20.7,31.15 C10.1 20.65,29.05 21.2,28.5 23.5,28.5 24.25,29.25 IC3.26 ; v5(27,26.5) 27,27.1 28.25,28.35 IC3.34 ; v1(51.6,42.6) 51.6,41.05 R9.1
  Mid-Layer 1 w0.28: v4(20.4,29.6) 20,29.6 20,37.8 20.2,38 30.9,38 31.9,37 31.9,34.7 ; v5(27,26.5) 27,29.8 27.2,30 28.7,30 31.9,33.2 31.9,33.9 ; v1(51.6,42.6) 51.5,42.7 47.1,42.7 46.6,42.2 46.6,40 45.2,38.6 41.8,38.6 41.5,38.3 41.5,36.4 39.4,34.3 32.3,34.3 ; 31.9,33.9 32.3,34.3 ; 31.9,33.9 31.9,34.3 ; 31.9,34.3 32.3,34.3 ; 31.9,34.3 31.9,34.7 ; 31.9,34.7 32.3,34.3
ATAGND: C1.2 C2.2 C3.2 C4.2 C10.2 C11.2 C12.2 C13.2 CN3.2 IC1.2 IC2.4 IC3.19 IC3.20 IC3.21 IC3.22 IC3.24 IC3.27 IC3.28 R7.2 R8.1 R54.1 R56.1 RT1.1 | length 62.9
  Top Layer w0.28: C4.2 RT1.1 C3.2 v4(9.35,45.35) 9.6,45.6 R54.1 ; v1(3.1,29.1) 3.6,29.1 3.9,29.4 C2.2 ; C1.2 v1(5.3,21) ; IC2.4 6.65,29.65 v1(7.1,30.1) ; IC1.2 11.459,25.259 v1(11.5,25.3) ; v4(17.7,31.2) 17.8,31.1 C10.2 ; v1@21.8,27.3 v1(21.7,27.2) 22.9,27.2 ; v6(22,29.6) 22,30.4 22.25,30.65 IC3.24 ; IC3.22 21.45,31.65 21.2,31.9 v4@21.2,32.2 ; IC3.21 21.25,32.15 v4@21.2,32.2 ; IC3.20 21.25,32.65 v4@21.2,32.6 ; IC3.19 21.45,33.15 21.2,32.9 v4@21.2,32.6 ; IC3.27 24.75,29.05 22.9,27.2 ; IC3.28 25.25,28.95 23.5,27.2 22.9,27.2 ; v1@43.4,40.7 v1(43.6,40.5) ; v1(43.8,35.2) R56.1 46.05,33.85 47.2,32.7 51.4,32.7 51.7,33 R8.1 ; v4@21.2,32.2 v4@21.2,32.6
  Top Layer w0.5: v1(24,24.1) 24.5,23.6 26.05,23.6 ; R7.2 26.05,23.6 ; C11.2 29.3,23.6 ; C12.2 30.5,23.6 29.3,23.6 ; 26.05,23.6 29.3,23.6
  Top Layer w1: C13.2 v1@43.4,40.7
  Bottom Layer w1: CN3.2 36.475,14.975 v1(36.5,15)
  other v4: 21,32.6
CELL_1: CN1.7 Q6.2 R53.1 R54.2 | length 40.6
  Top Layer w0.4: R54.2 9.6,51.3 ; R53.1 13.1,51.3 12.9,51.5 9.8,51.5 9.6,51.3 ; CN1.7 18.85,71.9 10.1,71.9 9.6,71.4 9.6,51.3
CELL_2: CN1.6 IC9.A Q5.2 R46.1 R48.1 R49.1 R51.1 R52.1 | length 43.7
  Top Layer w0.4: IC9.A 14.25,73.35 14.7,72.9 19.5,72.9 20.2,72.2 22.3,72.2 23.09,71.41 CN1.6 ; R52.1 14.9,52 15.4,51.5 18,51.5 18.4,51.1 R46.1
  Top Layer w1: R52.1 R51.1 R49.1 R48.1 14.9,66.2 15.7,67 17.8,67 19,68.2 22.7,68.2 23.09,68.59 CN1.6
CELL_3: CN1.5 IC8.A Q4.2 R39.1 R41.1 R42.1 R44.1 R45.1 | length 37.4
  Top Layer w0.4: IC8.A 20.35,73.85 21.1,73.1 24.6,73.1 25.63,72.07 CN1.5 ; R45.1 20.4,52.1 21,51.5 23.6,51.5 24.05,51.05 Q4.2 24.05,48.9 R39.1
  Top Layer w1: R45.1 R44.1 R42.1 R41.1 20.4,66.1 21,66.7 23.8,66.7 25.63,68.53 CN1.5
CELL_4: CN1.4 IC7.A Q3.2 R32.1 R34.1 R35.1 R37.1 R38.1 | length 31.2
  Top Layer w0.4: R38.1 25.9,52 26.3,51.6 29.2,51.6 29.55,51.25 Q3.2 29.6,50.15 R32.1 ; IC7.A 26.25,73.95 28.17,72.03 CN1.4
  Top Layer w1: R38.1 R37.1 R35.1 R34.1 25.9,65.6 28.17,67.87 CN1.4
CELL_5: CN1.3 IC6.A Q2.2 R25.1 R27.1 R28.1 R30.1 R31.1 | length 30.8
  Top Layer w0.4: CN1.3 30.71,71.41 32.05,72.75 IC6.A ; R31.1 31.4,52.5 32.3,51.6 35.5,51.6 36,51.1 R25.1
  Top Layer w1: CN1.3 30.71,68.39 31.4,67.7 R27.1 R28.1 R30.1 R31.1
CELL_6: CN1.2 IC5.A Q1.2 R18.1 R20.1 R21.1 R23.1 R24.1 | length 45.7
  Top Layer w0.3: CN1.2 33.25,71.35 34,72.1 38,72.1 38.55,72.65 IC5.A
  Top Layer w0.4: R18.1 43.6,49.95 Q1.2 43.55,50.65 44.9,52 v1(44.9,54.1)
  Top Layer w1: v1(33.1,52.9) 33.1,54 R24.1 R23.1 R21.1 R20.1 34.1,68.1 33.25,68.95 CN1.2
  Bottom Layer w0.4: v1(33.1,52.9) 34.3,54.1 v1(44.9,54.1)
CELL_7: CN1.1 IC4.A R10.1 R12.2 R13.1 R14.1 R16.1 R17.1 | length 36.2
  Top Layer w0.3: 39.6,69.4 43.8,69.4 44.35,69.95 IC4.A
  Top Layer w0.4: R10.1 R12.2 39.1,52.2 39.6,52.7 R17.1
  Top Layer w1: CN1.1 38.8,70.2 39.6,69.4 R16.1 R14.1 R13.1 R17.1
CLK_FROM_LOWER: CN3.4 IC3.12 R1.2 | length 85.9
  Top Layer w0.28: R1.2 8.6,37.7 9.9,39 v1(12.9,39) ; v1(11.8,12.5) 11.8,14.5 13.2,15.9 13.2,21.6 15.4,23.8 15.4,26.5 14.8,27.1 14.8,36.6 v1@16.3,38.1 ; v1(16.3,37.6) 17.3,38.6 23.4,38.6 23.75,38.25 IC3.12
  Mid-Layer 1 w0.28: v1(11.8,12.5) 11.8,9.4 12.3,8.9 33.3,8.9 33.7,9.3 v1(33.7,12.5) ; v1(12.9,39) 14.9,39 v1(16.3,37.6)
  Bottom Layer w0.28: CN3.4 32.08,12.82 32.4,12.5 v1(33.7,12.5)
CLK_TO_UPPER: CN2.4 IC3.43 | length 44.5
  Top Layer w0.28: IC3.43 38.55,33.65 40,32.2 40,11.1 39.3,10.4 32.7,10.4 32.08,11.02 CN2.4
D3V3: CN2.6 CN3.6 R55.2 | length 44.5
  Top Layer w0.28: CN2.6 29.54,10.16 30.2,9.5 45.1,9.5 45.8,10.2 45.8,18.1 46.3,18.6 49.3,18.6 50.1,19.4 R55.2
  Bottom Layer w0.28: v4(29.5,12.3) 29.54,12.34 CN3.6
DGND: CN2.11 CN3.11 Q7.2 | length 21.5
  Top Layer w0.28: Q7.2 13.7,13.95 13.7,21.1 15.9,23.3 v4(21.4,23.3) 21.92,22.78 CN2.11
  Bottom Layer w0.28: v4(21.4,23.3) 21.92,22.78 CN3.11
IRQ_FROM_UPPER: CN2.9 IC3.44 | length 46.6
  Top Layer w0.28: CN2.9 24.46,18.24 24.8,17.9 v4(38.8,17.9) ; IC3.44 40.85,34.15 v4(41,34)
  Bottom Layer w0.28: v4(38.8,17.9) 41,17.9 41.5,18.4 41.5,29.4 40.9,30 40.9,33.9 v4(41,34)
IRQ_TO_LOWER: CN3.9 IC3.11 R4.1 | length 44.8
  Top Layer w0.28: R4.1 14.25,30.35 14.3,30.4 ; v1@14.3,24.8 v1(14.3,24.9) 14.3,30.4 ; IC3.11 24.25,38.85 23.9,39.2 15.9,39.2 14.3,37.6 14.3,30.4
  Bottom Layer w0.28: v1(14.3,24.9) 14.3,18.9 14.5,18.7 23.9,18.7 24.46,19.26 CN3.9
ISO1: MH5.MOUNT
  other v2: 52,10.5 50.25,11.25 53.75,11.25 49.5,13 54.5,13 50.25,14.75 53.75,14.75 52,15.5
ISO2: MH6.MOUNT
  other v2: 2,10.5 0.25,11.25 3.75,11.25 -0.5,13 4.5,13 0.25,14.75 3.75,14.75 2,15.5
ISO3: MH1.MOUNT
  other v2: 52,55.5 50.25,56.25 53.75,56.25 49.5,58 54.5,58 50.25,59.75 53.75,59.75 52,60.5
ISO4: MH2.MOUNT
  other v2: 2,55.5 0.25,56.25 3.75,56.25 -0.5,58 4.5,58 0.25,59.75 3.75,59.75 2,60.5
ISO5: MH3.MOUNT
  other v2: 52,70.5 50.25,71.25 53.75,71.25 49.5,73 54.5,73 50.25,74.75 53.75,74.75 52,75.5
ISO6: MH4.MOUNT
  other v2: 2,70.5 0.25,71.25 3.75,71.25 -0.5,73 4.5,73 0.25,74.75 3.75,74.75 2,75.5
MBAT1: C5.2 IC3.10 R53.2 | length 23
  Top Layer w0.28: C5.2 R53.2 14.05,47.25 14.2,47.1 14.2,40.5 14.9,39.8 24.5,39.8 24.75,39.55 IC3.10
MBAT2: C5.1 C6.2 IC3.8 R46.2 | length 31.8
  Top Layer w0.28: v1(12,42.7) 12.8,42.7 13.1,43 C5.1 ; v1(16.2,43.5) 16.2,41.4 16.86,40.74 20.06,40.74 ; C6.2 19.65,45.55 19.7,45.5 ; R46.2 19.45,47.25 19.7,47 19.7,45.5 ; IC3.8 25.75,40.35 25.36,40.74 20.06,40.74 ; 19.7,45.5 19.7,41.1 20.06,40.74
  Mid-Layer 1 w0.28: v1(12,42.7) 16,42.7 16.2,42.9 v1(16.2,43.5)
MBAT3: C6.1 C7.2 IC3.6 R39.2 | length 24.7
  Top Layer w0.28: v1(18.2,42.3) 18.4,42.5 C6.1 ; v1(21.7,43.4) 21.7,42.4 22.4,41.7 25.7,41.7 25.9,41.9 ; C7.2 25.25,45.45 25.3,45.4 ; R39.2 24.95,47.25 25.3,46.9 25.3,45.4 ; IC3.6 26.75,41.05 25.3,42.5 25.3,45.4
  Mid-Layer 1 w0.28: v1(18.2,42.3) 21.4,42.3 21.7,42.6 v1(21.7,43.4)
MBAT4: C7.1 C8.2 IC3.4 R32.2 | length 21.1
  Top Layer w0.28: v1(23.9,42.8) 24.2,43.1 C7.1 ; IC3.4 27.75,39.55 29.2,41 ; v1(28,42.2) 29.2,41 ; C8.2 30.75,45.55 30.8,45.6 ; R32.2 30.45,47.25 30.8,46.9 30.8,45.6 ; 29.2,41 30.8,42.6 30.8,45.6
  Mid-Layer 1 w0.28: v1(23.9,42.8) 27.4,42.8 v1(28,42.2)
MBAT5: C8.1 C9.2 IC3.2 R25.2 | length 27.5
  Top Layer w0.28: v1(27.7,44.1) 27.75,44.05 C8.1 ; IC3.2 28.75,38.95 31.4,41.6 32.4,41.6 ; v1(32.5,43.9) 32.5,41.7 32.4,41.6 ; C9.2 36.85,45.55 36.9,45.6 ; R25.2 36.65,47.35 36.9,47.1 36.9,45.6 ; 32.4,41.6 36.4,41.6 36.9,42.1 36.9,45.6
  Mid-Layer 1 w0.28: v1(27.7,44.1) 32.3,44.1 v1(32.5,43.9)
MBAT6: C9.1 C14.2 IC3.48 R18.2 | length 33.6
  Top Layer w0.28: IC3.48 35.05,36.15 35.5,36.6 35.5,38.4 35.8,38.7 ; v1(35.6,40.1) 35.6,38.9 35.8,38.7 ; v1(35.6,42.8) 36,43.2 C9.1 ; C14.2 44.95,45.55 45,45.6 ; R18.2 44.75,47.15 45,46.9 45,45.6 ; 35.8,38.7 44.5,38.7 45,39.2 45,45.6
  Mid-Layer 1 w0.28: v1(35.6,40.1) v1(35.6,42.8)
MBAT7: C14.1 IC3.46 R10.2 | length 28.2
  Top Layer w0.28: IC3.46 36.65,35.15 37.3,35.8 v1(37.3,36.6) ; R10.2 37.8,45.8 v4(38,45.6) ; v1(43.5,42.8) C14.1
  Mid-Layer 1 w0.28: v1(37.3,36.6) 37.3,45 v4@37.8,45.5 ; v4(38,45.6) 40.2,45.6 40.7,45.1 40.7,43.3 41.2,42.8 v1(43.5,42.8)
MISO_FROM_UPPER: CN2.1 IC3.39 | length 15.2
  Top Layer w0.28: IC3.39 33.95,31.65 34.62,30.98 CN2.1
MISO_TO_LOWER: CN3.1 IC3.16 | length 49.1
  Top Layer w0.28: v1(16,32.7) 16,34.1 16.6,34.7 22.875,34.7 IC3.16
  Bottom Layer w0.28: v1(16,32.7) 16,33.4 17.8,35.2 17.8,37.3 18.2,37.7 35.2,37.7 36,36.9 36,28.9 34.62,27.52 CN3.1
MOSI_FROM_LOWER: CN3.3 IC3.15 | length 39.5
  Top Layer w0.28: v4(18.9,36.15) 19.9,35.15 IC3.15
  Bottom Layer w0.28: v4@18.9,36.7 19.4,37.2 35,37.2 35.5,36.7 35.5,29.1 34.1,27.7 34.1,23.7 33.8,23.4 32.2,23.4 32.08,23.28 CN3.3
MOSI_TO_UPPER: CN2.3 IC3.40 | length 24.7
  Top Layer w0.28: IC3.40 34.65,32.15 35.5,31.3 35.5,25.4 35.5,23.4 36.1,22.8 36.1,18.9 35.6,18.4 32.4,18.4 32.08,18.72 CN2.3
NCS_FROM_LOWER: CN3.7 IC3.13 | length 51.1
  Top Layer w0.28: v1(16,35.9) 16.8,35.9 17.3,36.4 17.3,37.4 18,38.1 21.7,38.1 22.1,37.7 22.1,36.4 22.35,36.15 IC3.13
  Mid-Layer 1 w0.28: v1(14.9,17.6) 14.9,23 16.2,24.3 17.9,24.3 20.4,26.8 20.4,28.1 19.7,28.8 15.9,28.8 14.5,30.2 14.5,34.8 15.8,36.1 v1(16,35.9)
  Bottom Layer w0.28: v1(14.9,17.6) 15.3,18 24.6,18 27,20.4 CN3.7
NCS_TO_UPPER: CN2.7 IC3.42 | length 30.2
  Top Layer w0.28: IC3.42 35.75,33.15 36.2,32.7 v1(37.4,32.7)
  Mid-Layer 1 w0.28: v4(27.7,18.9) 27.7,19.5 28.5,20.3 32.1,20.3 32.6,20.8 32.6,29.2 32.2,29.6 32.2,30.1 31.9,30.4 31.9,30.9 33.3,32.3 37,32.3 v1(37.4,32.7)
NetC3_1: C3.1 IC3.30 R6.1 RT1.2 | length 48.6
  Top Layer w0.28: R6.1 RT1.2 C3.1 4.55,46.7 v1(6.3,46.7) ; v1(18,26.5) 18.9,25.6 23.296,25.6 26.25,28.554 IC3.30
  Mid-Layer 1 w0.28: v1(6.3,40.4) 6.1,40.4 6.5,40.8 9.8,40.8 10.1,40.5 10.1,27.3 10.5,26.9 17.6,26.9 v1(18,26.5)
  Bottom Layer w0.28: v1(6.3,40.4) v1(6.3,46.7)
NetC4_1: C4.1 IC3.29 R5.1 | length 52.1
  Top Layer w0.28: v1(-0.8,47.6) -0.7,47.5 0.9,47.5 ; C4.1 0.9,47.5 ; R5.1 0.9,47.5 ; v1(19.2,27.7) 19.2,26.8 19.9,26.1 23.1,26.1 25.75,28.75 IC3.29
  Mid-Layer 1 w0.28: v1(-0.8,47.6) -0.8,42.5 -0.2,41.9 10.1,41.9 10.8,41.2 10.8,28 11.1,27.7 v1(19.2,27.7)
NetCN2_13: CN2.13 CN3.13 Q7.1 | length 13
  Top Layer w0.28: Q7.1 16.1,13.95 16.1,20.2 16.505,20.605 CN2.13
  Bottom Layer w0.28: v4(16.6,20.6) 17.025,21.025 CN3.13
NetIC1_3: IC1.3 R2.1 | length 4.5
  Top Layer w0.28: R2.1 5.2,23.5 5.56,23.14 IC1.3
NetIC2_1: IC2.1 R2.2 | length 1.5
  Top Layer w0.28: IC2.1 5.15,27.3 R2.2
NetIC2_2: IC2.2 IC2.3 R1.1 | length 5.7
  Top Layer w0.28: IC2.2 5.65,28.05 5.9,27.8 6.1,27.8 ; IC2.3 6.15,27.85 6.1,27.8 ; R1.1 8.6,28 8.4,27.8 6.1,27.8
NetIC3_1: IC3.1 R22.2 | length 14.4
  Top Layer w0.28: IC3.1 29.25,38.35 30.4,39.5 v1(31.8,39.5) ; v1(34.1,46) R22.2
  Bottom Layer w0.28: v1(31.8,39.5) 33.7,39.5 34.1,39.9 v1(34.1,46)
NetIC3_3: IC3.3 R29.2 | length 20.5
  Top Layer w0.28: v1(27.7,45.7) R29.2 ; IC3.3 28.25,39.25 31.3,42.3 31.3,48.4 v1(31.1,48.6)
  Bottom Layer w0.28: v1(27.7,45.7) 27.7,48 28.3,48.6 v1(31.1,48.6)
NetIC3_5: IC3.5 R36.2 | length 20.3
  Top Layer w0.28: v1(22.1,45.5) R36.2 ; v1(25.8,48.5) 25.8,42.64 27.25,41.19 IC3.5
  Bottom Layer w0.28: v1(22.1,45.5) 22.1,48.1 22.5,48.5 v1(25.8,48.5)
NetIC3_7: IC3.7 R43.2 | length 25.3
  Top Layer w0.28: v1(16.4,45.6) 16.5,45.7 R43.2 ; v1(20.1,48.6) 20.2,48.5 20.2,41.5 20.5,41.2 25.7,41.2 26.25,40.65 IC3.7
  Bottom Layer w0.28: v1(16.4,45.6) 16.4,48 17,48.6 v1(20.1,48.6)
NetIC3_9: IC3.9 R50.2 | length 30.2
  Top Layer w0.28: v1(11.3,45.8) R50.2 ; v1(14.5,49) 14.7,48.8 14.7,40.8 15.2,40.3 24.9,40.3 25.25,39.95 IC3.9
  Bottom Layer w0.28: v1(11.3,45.8) 11.3,48.8 11.7,49.2 14.3,49.2 v1(14.5,49)
NetIC3_17: IC3.17 R8.2 R9.2 | length 72.2
  Top Layer w0.28: v1(17.9,33.3) 18.75,34.15 IC3.17 ; R8.2 v1(51.7,37.6) R9.2
  Mid-Layer 1 w0.28: v1(17.9,33.3) 17.9,38 18.8,38.9 30.7,38.9 31.1,38.5 33.7,38.5 34.2,39 34.2,44 34.8,44.6 35.8,44.6 36.2,45 36.2,46.5 36.7,47 40.4,47 40.7,47.3 40.7,49.1 41.5,49.9 52,49.9 53.3,48.6 53.3,38.2 52.7,37.6 v1(51.7,37.6)
NetIC3_31: IC3.31 R5.2 R6.2 | length 58.4
  Top Layer w0.254: v1(-1.2,49.8) 2.45,49.8 R6.2 ; v1(16.7,25.5) 17.1,25.1 23.4,25.1 26.75,28.45 IC3.31
  Mid-Layer 1 w0.254: v1(-1.2,49.8) -2.1,48.9 -2.1,46.6 -1.4,45.9 -1.4,39.5 -0.9,39 8.9,39 9.2,38.7 9.2,27 9.8,26.4 15.8,26.4 v1(16.7,25.5)
NetIC3_32: IC3.32 R7.1 | length 5
  Top Layer w0.28: R7.1 25.6,26.6 27.25,28.25 IC3.32
NetIC3_47: IC3.47 R15.2 | length 35.6
  Top Layer w0.28: IC3.47 35.65,35.65 36,36 36,37.9 36.3,38.2 45,38.2 45.6,38.8 45.6,48.3 v1(45.3,48.6) ; v1(41.7,45.7) R15.2
  Mid-Layer 1 w0.28: v1(41.7,45.7) 41.7,48.2 42.1,48.6 v1(45.3,48.6)
NetIC4_K: IC4.K R11.1 | length 2.1
  Top Layer w0.3: R11.1 41.7,74.25 IC4.K
NetIC5_K: IC5.K R19.1 | length 2.1
  Top Layer w0.3: R19.1 35.7,74.05 IC5.K
NetIC6_K: IC6.K R26.1 | length 2.1
  Top Layer w0.4: R26.1 29.2,74.05 IC6.K
NetIC7_K: IC7.K R33.1 | length 2.1
  Top Layer w0.4: R33.1 23.4,74.05 IC7.K
NetIC8_K: IC8.K R40.1 | length 2.1
  Top Layer w0.4: R40.1 17.5,74.05 IC8.K
NetIC9_K: IC9.K R47.1 | length 2.1
  Top Layer w0.3: R47.1 11.5,75.85 IC9.K
NetIC10_1: IC10.1 R55.1 | length 1.5
  Top Layer w0.28: IC10.1 50.025,28.025 R55.1
NetIC10_2: IC10.2 Q7.3 | length 66
  Top Layer w0.28: Q7.3 14.9,9.5 15.5,8.9 46.2,8.9 46.3,9 46.3,17.2 47,17.9 53.5,17.9 54.2,18.6 54.2,29.9 53.365,30.735 IC10.2
NetQ1_1: Q1.1 R15.1 | length 1.4
  Top Layer w0.4: Q1.1 41.65,48.7 R15.1
NetQ1_3: Q1.3 R11.2 R13.2 R14.2 R16.2 R17.2 | length 33
  Top Layer w0.3: R11.2 40.7,76.8 40.8,76.9 45.1,76.9 45.5,76.5 45.5,64.5 45,64 R16.2
  Top Layer w0.5: R17.2 42.6,54.8 Q1.3
  Top Layer w1: R17.2 R13.2 R14.2 R16.2
NetQ2_1: Q2.1 R22.1 | length 1.5
  Top Layer w0.28: Q2.1 34.05,49 R22.1
NetQ2_3: Q2.3 R19.2 R20.2 R21.2 R23.2 R24.2 | length 41.7
  Top Layer w0.3: v1(34.4,76.8) 34.4,76.7 34.9,76.2 R19.2
  Top Layer w0.4: R20.2 v1(36.9,65.8)
  Top Layer w0.5: Q2.3 36.4,52.8 36.9,53.3 R24.2
  Top Layer w1: R24.2 R23.2 R21.2 R20.2
  Bottom Layer w0.4: v1(34.4,76.8) 42.8,76.8 43.5,76.1 43.5,67.4 42.7,66.6 37.3,66.6 36.9,66.2 v1(36.9,65.8)
NetQ3_1: Q3.1 R29.1 | length 1.5
  Top Layer w0.28: Q3.1 27.7,50.15 R29.1
NetQ3_3: Q3.3 R26.2 R27.2 R28.2 R30.2 R31.2 | length 52.5
  Top Layer w0.4: v1(27.9,76.8) 28.4,76.3 R26.2 ; R27.2 28.8,64.2 v1(28.8,65.9)
  Top Layer w0.5: Q3.3 R31.2
  Top Layer w1: R31.2 R30.2 R28.2 R27.2
  Bottom Layer w0.4: v1(27.9,76.8) 32.3,76.8 33.4,75.7 42.4,75.7 42.8,75.3 42.8,68 42,67.2 35.4,67.2 34.1,65.9 v1(28.8,65.9)
NetQ4_1: Q4.1 R36.1 | length 1.6
  Top Layer w0.4: R36.1 22.15,48.8 Q4.1
NetQ4_3: Q4.3 R33.2 R34.2 R35.2 R37.2 R38.2 | length 59.1
  Top Layer w0.4: v1(22.3,76.7) 22.6,76.4 R33.2
  Top Layer w0.5: Q4.3 R38.2
  Top Layer w1: R38.2 R37.2 R35.2 R34.2
  Bottom Layer w0.4: v1(22.3,76.7) 25.7,76.7 27.26,75.14 41.46,75.14 42.24,74.36 42.24,68.34 41.8,67.9 35.1,67.9 34.4,67.2 25.9,67.2 v1(23.9,65.2)
NetQ5_1: Q5.1 R43.1 | length 1.5
  Top Layer w0.4: Q5.1 16.45,48.8 R43.1
NetQ5_3: Q5.3 R40.2 R41.2 R42.2 R44.2 R45.2 | length 26.5
  Top Layer w0.4: v1(16.1,76.6) 16.7,76 R40.2
  Top Layer w0.5: Q5.3 17.4,54.8 R45.2
  Top Layer w1: R45.2 R44.2 R42.2 R41.2 17.6,64.8 v1(18.2,65.4)
  Bottom Layer w0.4: v1(16.1,76.6) 16.1,67.5 v1(18.2,65.4)
NetQ6_1: Q6.1 R50.1 | length 1.5
  Top Layer w0.4: Q6.1 11.25,48.9 R50.1
NetQ6_3: Q6.3 R47.2 R48.2 R49.2 R51.2 R52.2 | length 23.9
  Top Layer w0.5: v4(9.4,73.5) 10.4,73.5 10.6,73.7 R47.2 ; R52.2 12.2,54.9 Q6.3
  Top Layer w1: v4(12,66.1) 12.1,66 R48.2 R49.2 R51.2 R52.2
  Bottom Layer w0.4: v4(9.4,73.5) 9.4,71.4 12,68.8 v4(12,66.1)
P3V3: C1.1 C2.1 C11.1 C12.1 CN3.14 IC1.4 IC2.6 IC2.7 IC2.8 IC3.36 R4.2 | length 97.4
  Top Layer w0.28: C2.1 3.9,33.5 4.2,33.8 5.2,33.8 ; IC2.8 5.15,33.75 5.2,33.8 ; C1.1 5.31,18.06 IC1.4 7.3,18.028 v1(7.3,15) ; IC2.7 5.65,33.75 5.7,33.8 ; IC2.6 6.15,33.35 5.7,33.8 ; v4(13.1,33.4) 13.2,33.3 R4.2 ; IC3.36 v4@29.25,28.312 ; C11.1 29.25,26.8 v4@29.25,28.312 ; C12.1 31.3,28.1 31.087,28.312 v4@29.25,28.312 ; 5.2,33.8 5.7,33.8
  Bottom Layer w0.28: v4(4,33.8) 8.7,33.8 9.6,32.9 9.6,30.8 10.8,29.6 ; v4(13.1,33.4) 13.1,30.1 13.6,29.6 ; CN3.14 19.38,9.38 18.9,8.9 8.3,8.9 7.3,9.9 v1(7.3,15) 7.3,17.4 9.1,19.2 9.1,28.7 10,29.6 10.8,29.6 ; v4(29.8,28.1) 25,28.1 24.4,28.7 24.4,29.8 23.4,30.8 19.5,30.8 18.3,29.6 13.6,29.6 ; 10.8,29.6 13.6,29.6
PD_IN_FROM_UPPER: CN2.8 IC3.38 IC10.3 R56.2 | length 44.7
  Top Layer w0.28: CN2.8 27,11.6 v1(27.1,11.5) ; IC3.38 32.75,31.15 v1(33.4,30.5) ; v1(42.1,31.1) 43.41,31.1 IC10.3 43.775,32.325 R56.2
  Mid-Layer 1 w0.28: v1@27,11.5 27,17.2 27.6,17.8 33,17.8 33.4,18.2 v1(33.4,30.5) 38.4,30.5 39,31.1 v1(42.1,31.1)
PD_OUT_TO_LOWER: CN3.8 IC3.35 | length 21.4
  Top Layer w0.28: v5(27,24.9) 27,24.8 27.5,24.8 28,25.3 28,27.1 28.75,27.85 IC3.35
  Mid-Layer 1 w0.28: v1@25.8,12.9 25.8,21.6 27,22.8 v5(27,24.9)
  Bottom Layer w0.28: v1(25.9,12.7) 25.9,13.875 CN3.8
SCK_FROM_LOWER: CN3.5 IC3.14 | length 35.7
  Top Layer w0.28: v4(21.1,36.1) 21.55,35.65 IC3.14
  Bottom Layer w0.28: v4@21,36.3 21.4,36.7 34.4,36.7 35.06,36.04 35.06,29.46 33.6,28 33.6,24.5 33.2,24.1 30,24.1 29.54,23.64 CN3.5
SCK_TO_UPPER: CN2.5 IC3.41 | length 27.5
  Top Layer w0.28: CN2.5 29.54,19.66 v4(30.3,18.9) ; IC3.41 35.15,32.65 36.1,31.7 36.1,27.7 v1(36.7,27.1)
  Bottom Layer w0.28: v4(30.3,18.9) 36,18.9 36.7,19.6 v1(36.7,27.1)
THERMGND: IC3.PAD
  other v3: 24.3,31.2 25.4,31.2 26.5,31.2 27.6,31.2 28.7,31.2 24.3,32.3 25.4,32.3 26.5,32.3 27.6,32.3 28.7,32.3 24.3,33.4 25.4,33.4 26.5,33.4 27.6,33.4 28.7,33.4 24.3,34.5 25.4,34.5 26.5,34.5 27.6,34.5 28.7,34.5 24.3,35.6 25.4,35.6 26.5,35.6 27.6,35.6 28.7,35.6
VDD_FROM_UPPER: CN2.14 IC3.37 R3.2 | length 81
  Top Layer w0.28: CN2.14 19.38,12.12 20.1,11.4 v1(21.2,11.4) ; IC3.37 30.85,30.65 31,30.5 v4@31,29.6 ; v1(48,34.1) 49.75,34.1 R3.2
  Mid-Layer 1 w0.28: v1(21.2,11.4) 21.4,11.2 21.4,10.3 22.1,9.6 31.5,9.6 32.3,10.4 32.3,16.2 32.5,16.4 47.1,16.4 48,17.3 48,33.2 ; v4(31,29.5) 31,31.4 33.4,33.8 38.8,33.8 39.7,32.9 47.7,32.9 48,33.2 ; v1(48,34.1) 48,33.2
VDD_HV: C13.1 CN2.10 IC3.45 IC10.4 R3.1 R12.1 | length 96
  Top Layer w0.28: IC3.45 38.55,34.65 39.4,35.5 v1(39.4,36)
  Top Layer w0.4: C13.1 v4(38.7,42.5) v4(38.7,44) 38.7,44.2 39.4,44.9 39.4,46.3 39.1,46.6 R12.1
  Top Layer w0.5: CN2.10 24.6,15.255 v1(24.6,11.6) ; IC10.4@43.71,29.4 IC10.4 43.775,27.825 v1(44,27.6) ; v4(46.5,37.6) 49.4,37.6 49.8,37.2 R3.1
  Bottom Layer w0.5: v1(24.6,11.6) 25.8,10.4 38.6,10.4 39,10.8 ; v4(38.7,44) v4(38.7,42.5) 38.7,38.6 ; 39.1,10.8 39,10.8 ; v1(39.4,36) 39.4,37.5 38.7,38.2 38.7,38.6 ; v1(44,27.6) 46.4,27.6 46.5,27.7 ; 38.7,38.6 45.5,38.6 v4(46.5,37.6) 46.5,27.7 ; 39,10.8 45.4,10.8 46.5,11.9 46.5,27.7
pads on no net: CN1.8 CN2.2 CN2.12 CN3.10 CN3.12 FID8_1.1 FID8_1_1.1 FID10_1.1 FID10_1_1.1 IC1.1 IC2.5 IC3.18 IC3.25 IC3.33 SN1.0 SN2.0 SN3.0 SN4.0 TOOLHOLE1_1.TOOL TOOLHOLE1_1_1.TOOL TOOLHOLE5_1.TOOL1 TOOLHOLE5_1_1.TOOL1

## Polygon pours and split planes (outlines as drawn)
ATAGND on Bottom Layer "Bottom Layer-No Net" (solid, remove dead copper, pour order 4): -3,78 57,78 57,8 -3,8
ATAGND on Top Layer "Bottom Layer-No Net" (solid, remove dead copper, pour order 3): -3,78 57,78 57,8 -3,8
ATAGND on Internal Plane 1 (split plane): 67.49,-3.49 -10.49,-3.49 -10.49,88.49 67.49,88.49

## Keep-outs
Keep-Out Layer:
  lines w0.5: -3,8 -3,78 57,78 57,8 -3,8

## Other copper
Top Layer:
  text "rLoop - BMS, Rev 1.0" at 8.5,-1.7 h3

## Silkscreen, mask and mechanical layers (free items; w line width, h text height)
Top Overlay:
  lines w0.12: 36.5,48.3 36.9,48.7 36.9,50.9
  text "Battery Management Pod" at 36.5,24.3 h2
  text "Rev 1.0" at 36.4,21.9 h2
  text "S/N:" at 36.3,17.1 h2
Mechanical 1:
  lines w0.1: -11,-4 68,-4 68,89 -11,89 -11,-4
  lines w0.127: -3,8 57,8 57,78 -3,78 -3,8
Mechanical 3:
  lines w2.4: -4.2,6.8 58.2,6.8 58.2,79.2 -4.2,79.2 -4.2,6.8

## Text inside footprints (layer, text, board x,y; h text height)
LBL1: Top Overlay "rloop.org" at 38.05,10.7 h1